# Altium PCB SRX.PcbDoc (part 2 of 2)
Units mm, origin at the board's own origin, x right, y up, seen from the top; angles counter-clockwise.
Board outline 75 x 42 mm, 4 copper layers (Outer Top Layer, Inner Top Layer, Inner Bottom Layer, Outer Bottom Layer), stack 1.564 mm thick; 114 components, 89 nets, 403 pads, 367 vias.
Unrouted connection lines stored in the file: 107.
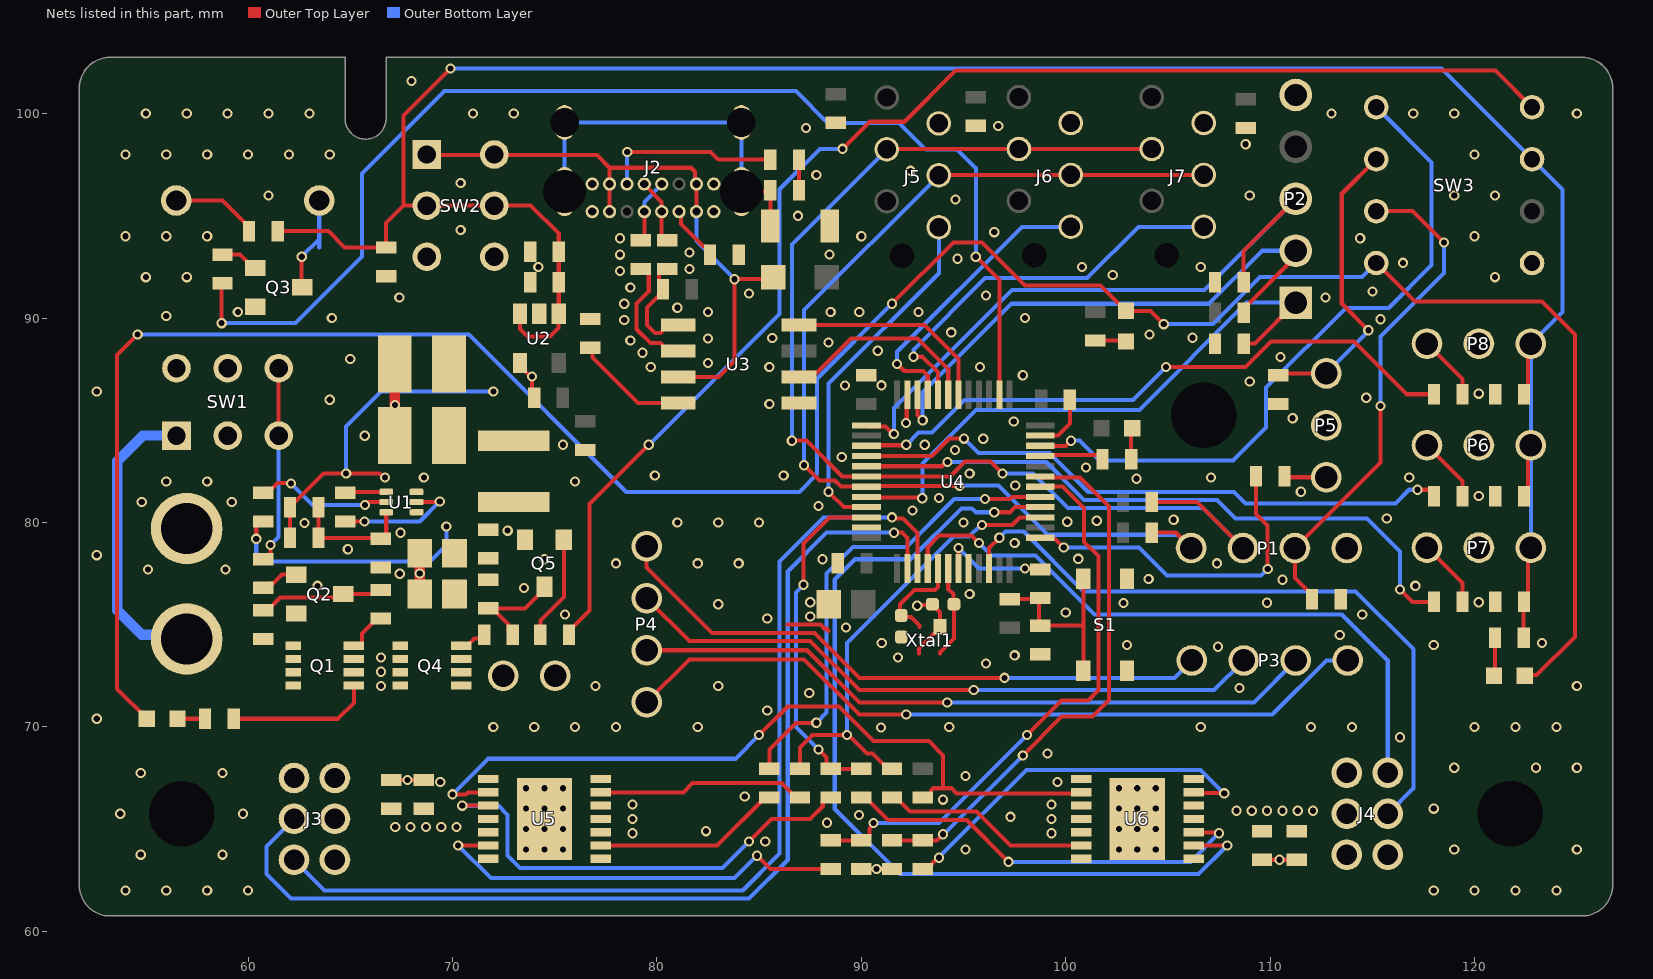
[diagram p4: the nets of this part, all layers, seen from the top]

## Via types
v1: diameter 0.5, hole 0.3, Outer Top Layer to Outer Bottom Layer, 367 vias

## Nets (pads, with @x,y where several pads share a name; then routed paths per layer and width w, separated by ;. In a path a pad name is that pad's centre, name@x,y a point inside that pad or via, vN(x,y) a via of type N, cw(c..) or ccw(c..) an arc to the next point about the centre after c; other vN are vias at no path point) (continued)
+5V: C2.2 C12.2 C13.1 C32.1 C33.1 C34.1 P6.1 P7.1 P8.1 R4.1 R19.1 SW2.2 SW2.5 SW3.7 U2.1 U2.3 | length 116.3
  Outer Top Layer w0.2: R4.1@61.45,94.25 63.925,94.25 64.725,93.45 C12.2@66.75,93.45 66.75,94.648 67.602,95.5 ; v1(69.9,102.2) 67.602,99.902 67.602,95.5 ; U2.3@73.3,90.2 73.3,89.461 73.661,89.1 74.775,89.1 75.192,89.517 75.192,90.192 U2.1@75.2,90.2 C2.2@75.2,91.75 ; C2.2@75.25,91.8 C2.2@75.2,91.75 ; R19.1@122.4,74.35 122.4,76.103 C33.1@122.41,76.113 122.61,76.313 122.61,78.633 P7.1@122.75,78.773 ; C32.1@122.41,81.273 122.61,81.473 122.61,83.633 P6.1@122.75,83.773 ; C34.1@122.41,86.273 122.61,86.473 122.61,88.61 P8.1@122.75,88.75 ; 67.602,95.5 SW2.2@68.75,95.5 SW2.5@72.05,95.5 73.825,95.5 75.2,94.125 C13.1@75.2,93.25 C2.2@75.2,91.75
  Outer Bottom Layer w0.2: v1(69.9,102.2) 118.38,102.2 124.3,96.28 124.3,90.3 P8.1@122.75,88.75 P6.1@122.75,83.773 P7.1@122.75,78.773
+12V: C4.2 C5.2 C6.2 C15.2 C16.2 C20.2 C21.2 J3.2 J4.2 Q1.1 Q1.2 Q1.3 Q4.5 Q4.6 Q4.7 Q4.8 R3.1 R9.2 R20.2 U1.1 U5.11 U5.12 U6.11 U6.12 | length 19.6
  Outer Top Layer w0.2: R20.2@59.3,70.4 64.4,70.4 65.175,71.175 Q1.1@65.175,72.025 ; v1(60.4,79.2) 60.4,79.85 60.6,80.05 R3.1@60.75,80.05
  Outer Bottom Layer w0.2: v1(60.4,79.2) 60.4,78.4 60.7,78.1 68.9,78.1 69.7,78.9 v1(69.7,79.8)
  other v1: 67.2,65.1 67.95,65.1 68.7,65.1 69.45,65.1 70.2,65.1 108.35,65.9 109.1,65.9 109.85,65.9 110.6,65.9 111.35,65.9 112.1,65.9 66.5,72 66.5,72.7 66.5,73.4
BAT+: J1.1 Q1.5 Q1.6 Q1.7 Q1.8 R2.2 SW1.1 SW1.2 SW1.5 SW1.6 | length 14.7
  Outer Bottom Layer w0.5: SW1.1@56.5,84.25 54.85,84.25 53.6,83 53.6,75.7 54.793,74.507 56.793,74.507 J1.1@57,74.3
BAT_SW: R6.2 SW1.3 SW1.4 | length 9.7
  Outer Top Layer w0.2: R6.2@60.75,78.2 60.9,78.2 61.1,78.4 v1(61.1,78.9) ; SW1.3@61.5,84.25 SW1.4@61.5,87.55
  Outer Bottom Layer w0.2: v1(61.1,78.9) 61.5,79.3 SW1.3@61.5,84.25
BOOT0: P2.1 R39.2 U4.44 | length 29.4
  Outer Top Layer w0.2: U4.44@90.25,81.25 90.283,81.217 92.95,81.217 v1(92.983,81.185) ; R39.2@108.7,88.75 109.25,88.75 P2.1@111.25,90.75
  Outer Bottom Layer w0.2: v1(92.983,81.185) 92.983,82.883 95.6,85.5 103.6,85.5 108.85,90.75 P2.1@111.25,90.75
BUZZER: R8.1 U4.26 | length 59.1
  Outer Top Layer w0.2: v1(58.71,89.75) 58.71,91.66 R8.1@58.75,91.7 ; v1(95.6,93) 96.75,91.85 U4.26@96.75,86.25
  Outer Bottom Layer w0.2: v1(58.71,89.75) 62.325,89.75 65.575,93 65.575,97.075 69.6,101.1 86.8,101.1 88.35,99.55 91.85,99.55 93.15,98.25 94.675,98.25 95.6,97.325 v1(95.6,93)
CS: R24.1 R25.1 U4.46 | length 17.1
  Outer Top Layer w0.2: v1(87.175,76.95) 87.175,78.975 88.45,80.25 U4.46@90.25,80.25 ; v1(87.9,68.9) 88.3,68.5 88.3,67.95 88.8,67.95 R25.1@90,67.95
  Outer Bottom Layer w0.2: v1(87.175,76.95) 86.8,76.575 86.8,70 v1(87.9,68.9)
D_N: J2.A7 J2.B7 R16.1 | length 3.2
  Outer Top Layer w0.2: R16.1@79.2,93.8 79.385,93.985 J2.A7@79.385,95.205
  Outer Bottom Layer w0.2: J2.A7@79.385,95.205 79.394,95.214 79.394,95.68 80.235,96.521 J2.B7@80.235,96.555
D_P: J2.A6 J2.B6 R13.1 | length 3.3
  Outer Top Layer w0.2: J2.B6@79.385,96.555 79.385,96.521 80.235,95.671 80.235,94 80.435,93.8 R13.1@80.5,93.8
DBG_LED: R21.2 U4.21 | length 3.2
  Outer Top Layer w0.2: U4.21@98.75,83.25 98.795,83.295 101.6,83.295 101.8,83.095 R21.2@101.8,83
EN: R31.2 U4.7 | length 5.4
  Outer Top Layer w0.2: U4.7@94.75,77.75 v1(94.75,78.75) ; v1(98,77.75) 98.7,77.75 R31.2@98.75,77.7
  Outer Bottom Layer w0.2: v1(94.75,78.75) 95.75,77.75 v1(98,77.75)
GND: C2.1 C3.1 C4.1 C5.1 C6.1 C8.1 C9.1 C10.2 C11.2 C12.1 C13.2 C14.1 C15.1 C16.1 C17.2 C18.2 C19.1 C20.1 C21.1 C22.2 C23.2 C24.2 C25.1 C26.1 C27.1 C28.2 C29.2 C30.2 C31.2 C32.2 C33.2 C34.2 C35.2 J1.2 J2.A1 J2.A12 J2.B1 J2.B12 J3.1 J4.1 J5.2 J6.2 J7.2 P1.1 P2.5 P5.2 P6.2 P7.2 P8.2 P9.2 Q2.2 Q3.2 Q5.2 R7.1 R14.1 R15.2 R17.2 R38.1 R39.1 S1.3 S1.4 SW3.5 U1.3 U2.2 U2.4 U3.1 U4.8 U4.23 U4.35 U4.47 U5.3 U5.4 U5.5 U5.15 U6.3 U6.4 U6.5 U6.15 Xtal1.2 Xtal1.4 | length 24
  Outer Top Layer w0.2: C15.1@67,67.4 v1(67.8,67.4) C20.1@68.6,67.4 ; U2.4@73.3,87.8 73.3,87.65 73.808,87.142 v1(73.889,87.142) 73.889,86.211 C3.1@74,86.1 ; 86.391,75.003 87.997,75.003 88.2,74.8 88.3,74.8 88.4,74.7 ; C14.1@86.95,96.25 R14.1@86.95,97.75 ; C23.2@90,63.05 C24.2@91.5,63.05 ; v1(92.19,84.859) 92.22,84.889 92.22,86.22 U4.35@92.25,86.25 ; v1(92.738,75.927) 92.775,75.963 93.438,75.963 C27.1@93.475,76 93.475,75.983 93.85,75.608 Xtal1.4@93.85,74.9 93.85,74.85 92.825,73.825 Xtal1.2@92.825,73.6 ; U4.23@98.75,84.25 99.618,84.25 100.2,84.832 C18.2@100.2,86 ; C21.1@109.6,63.5 C16.1@111.3,63.5
  Outer Top Layer w0.5: C9.1@67.175,84.25 67.186,84.261 v1(67.186,85.75) 67.175,85.761 C8.1@67.175,87.75 ; C4.1@68.4,76.5 C5.1@68.4,78.5
  other v1: 54,62 56,62 58,62 60,62 118,62 120,62 122,62 124,62 90.75,63.05 110.45,63.5 54.75,63.75 58.75,63.75 73.6,64 74.5,64 75.4,64 95.1,64 102.6,64 103.5,64 104.4,64 119,64 125,64 85.3,64.4 78.8,64.8 99.3,64.8 82.4,64.9 73.6,65 74.5,65 75.4,65 102.6,65 103.5,65 104.4,65 88.317,65.311 78.8,65.5 99.3,65.5 97.3,65.6 89.882,65.691 53.75,65.75 59.75,65.75 73.6,66 74.5,66 75.4,66 102.6,66 103.5,66 104.4,66 118,66 78.8,66.2 99.3,66.2 93.995,66.44 84.3,66.6 73.6,67 74.5,67 75.4,67 102.6,67 103.5,67 104.4,67 69.4,67.3 99.6,67.3 95.1,67.6 54.75,67.75 58.75,67.75 119,68 123,68 125,68 99.1,68.7 116.354,69.494 90.966,69.967 72,70 74,70 76,70 78,70 82,70 94.3,70 106.6,70 112,70 114,70 120,70 122,70 124,70 52.6,70.4 85.4,70.8 87.452,71.661 108.5,71.9 77,72 83,72 125,72 96.1,73.1 91.8,73.4 97.5,73.5 107.448,73.922 103,74 118,74 91,74.1 123.3,74.1 113.4,74.5 89.255,74.856 85.4,75.3 87.5,75.4 75.5,75.5 114.5,75.5 100,75.6 83,76 102.823,76.056 109.837,76.071 87.5,76.1 120.2,76.1 95.3,76.5 73.5,76.8 63.4,76.9 117.1,76.9 110.6,77.2 104.054,77.233 67.42,77.494 68.4,77.5 55.1,77.7 58.9,77.7 78,78 82,78 84,78 107.4,78 74.5,78.2 88.1,78.2 100.614,78.222 52.6,78.4 64.882,78.693 97.5,79 67.454,79.498 72.7,79.6 62.758,79.975 81,80 83,80 85,80 95,80 100.074,80.038 101.514,80.084 105.279,80.13 115.7,80.2 92.5,80.592 87.9,80.8 54.8,81 59.2,81 93.8,81.2 120.2,81.3 111.5,81.5 97.528,81.809 56,82 58,82 76,82 103.457,82.139 68.6,82.2 107.1,82.2 116.8,82.2 79.9,82.3 86.2,82.3 95.3,82.4 100.985,82.695 89.041,83.207 94.588,83.549 75.4,83.8 93.1,83.8 95.967,84.097 65.707,84.239 97.454,84.94 111.1,85.1 85.5,85.8 64,86 114.7,86.1 120.2,86.3 52.6,86.4 89.2,86.7 90.983,86.709 109,86.9 97.9,87.2 79.7,87.6 85.5,87.6 95.8,87.6 82.5,87.8 65,88 110.5,88.1 79.3,88.3 90.8,88.4 88.4,88.8 78.7,88.9 82.5,89 85.643,89.021 106.195,89.037 104.1,89.2 94.4,89.3 78.4,89.9 115.394,89.939 64.1,90 98,90 56,90.1 59.5,90.3 82.5,90.3 88.5,90.3 89.9,90.3 92.8,90.3 81,90.5 78.4,90.7 67.4,91 112.7,91 96.1,91.1 84.5,91.2 115,91.3 78.7,91.5 55,92 57,92 121,92 102.3,92.1 78.2,92.3 81.6,92.4 74.2,92.5 100.8,92.5 106.6,92.5 116.5,92.7 94.7,92.9 78.2,93.1 88.445,93.111 81.6,93.2 78.2,93.9 114.4,93.9 54,94 56,94 58,94 90,94 120,94 96.5,94.2 70.4,94.3 86.9,95 94.6,95.8 61,96 109,96 119,96 121,96 70.4,96.6 87.8,97 92.4,97.2 54,98 56,98 58,98 60,98 62,98 64,98 120,98 108.8,98.5 87.3,99.3 96.7,99.4 55,100 57,100 59,100 61,100 63,100 71,100 73,100 113,100 117,100 119,100 125,100 68,101.6
HE1_A: J3.5 U4.2 | length 52.4
  Outer Top Layer w0.2: v1(91.6,79.5) 92,79.5 92.25,79.25 U4.2@92.25,77.75
  Outer Bottom Layer w0.2: J3.5@62.25,65.5 60.9,64.15 60.9,62.8 62.1,61.6 84.5,61.6 86.4,63.5 86.4,77.6 88.3,79.5 v1(91.6,79.5)
HE1_B: J3.6 U4.3 | length 49.1
  Outer Top Layer w0.2: v1(91.5,80.25) 91.557,80.193 92.04,80.193 92.75,79.483 U4.3@92.75,77.75
  Outer Bottom Layer w0.2: J3.6@62.25,63.5 63.75,62 84.2,62 86,63.8 86,78.1 88.15,80.25 v1(91.5,80.25)
HE2_A: J4.6 U4.4 | length 31.8
  Outer Top Layer w0.2: U4.4@93.25,77.75 93.25,78.8 93.808,79.358 95.392,79.358 v1(95.75,79)
  Outer Bottom Layer w0.2: v1(95.75,79) 96.369,78.381 98.519,78.381 101.4,75.5 113.5,75.5 115.75,73.25 J4.6@115.75,67.75
HE2_B: J4.5 U4.10 | length 33
  Outer Top Layer w0.2: U4.10@96.25,77.75 96.25,78.75 v1(96.75,79.25)
  Outer Bottom Layer w0.2: v1(96.75,79.25) 97.055,79.555 97.945,79.555 100.872,76.628 114.172,76.628 117,73.8 117,67 J4.5@115.75,65.75
IS1: C23.1 R28.1 U4.18 | length 28.2
  Outer Top Layer w0.2: R28.1@88.5,64.45 90.2,64.45 90.4,64.65 90.4,65.019 90.6,65.219 v1(90.6,65.3) ; v1(98.1,69.6) 99.8,71.3 101.1,71.3 101.6,71.8 101.6,78.35 100.9,79.05 100.9,80.7 99.85,81.75 U4.18@98.75,81.75
  Outer Bottom Layer w0.2: v1(90.6,65.3) 93.8,65.3 v1(98.1,69.6)
IS2: C24.1 R29.1 U4.19 | length 26.9
  Outer Top Layer w0.2: C24.1@91.5,64.45 R29.1@93,64.45 93.7,64.45 v1(94,64.75) ; v1(97.9,68.6) 99.8,70.5 101.3,70.5 102.125,71.325 102.125,80.775 100.696,82.204 98.796,82.204 U4.19@98.75,82.25
  Outer Bottom Layer w0.2: v1(94,64.75) 94.05,64.75 v1(97.9,68.6)
LED_GND: D3.1 D4.1 D5.1 SW3.4 | length 123.5
  Outer Top Layer w0.2: v1(54.6,89.2) 53.6,88.2 53.6,71.85 D5.1@55.05,70.4 ; v1(91.5,90.7) 94.5,93.7 95.9,93.7 98,91.6 101.7,91.6 D3.1@102.95,90.35 104.142,90.35 v1(104.792,89.7) ; SW3.4@115.19,92.69 117.08,90.8 123.3,90.8 124.9,89.2 124.9,74.4 123.033,72.533 122.483,72.533 D4.1@122.45,72.5
  Outer Bottom Layer w0.2: v1(54.6,89.2) 70.8,89.2 78.5,81.5 86.967,81.5 87.831,82.363 87.831,87.031 v1(91.5,90.7) ; v1(104.792,89.7) 107.2,89.7 109.5,92 114.5,92 SW3.4@115.19,92.69
LIGHTS: R11.2 SW3.8 | length 66
  Outer Top Layer w0.2: R11.2@75.7,74.5 75.7,74.7 76.7,75.7 76.7,80.9 v1(79.6,83.8) ; v1(89.08,98.277) 90.403,99.6 92.1,99.6 94.6,102.1 121.02,102.1 SW3.8@122.81,100.31
  Outer Bottom Layer w0.2: v1(79.6,83.8) 79.608,83.8 86,90.192 86,96.3 87.977,98.277 v1(89.08,98.277)
LIGHTS_PWR: P9.1 Q4.1 Q4.2 Q4.3
LIGHTS_SW: SW3.1 U4.22 | length 33.6
  Outer Top Layer w0.2: U4.22@98.75,83.75 100,83.75 v1(100.25,84)
  Outer Bottom Layer w0.2: v1(100.25,84) 100.683,84 101.642,83.041 108.191,83.041 109.8,84.65 109.8,86.6 113.7,90.5 115.8,90.5 117.9,92.6 117.9,97.6 SW3.1@115.19,100.31
M1_N: J3.4 U5.7 U5.8
M1_P: J3.3 U5.1 U5.14
M2_N: J4.4 U6.7 U6.8
M2_P: J4.3 U6.1 U6.14
MCU_RX: U3.2 U4.31 | length 10
  Outer Top Layer w0.2: U3.2@86.95,87.115 87.175,87.34 87.84,87.34 89.5,89 92.75,89 94.25,87.5 U4.31@94.25,86.25
MCU_TX: U3.4 U4.30 | length 10.2
  Outer Top Layer w0.2: U3.4@86.95,89.655 93.095,89.655 94.75,88 U4.30@94.75,86.25
NetC1_1: C1.1 R1.1 R7.2 U1.6 | length 6
  Outer Top Layer w0.2: C1.1@63.45,80.75 R1.1@63.45,79.25 66.45,79.25 R7.2@66.5,79.2 66.56,79.2 66.76,79.4 U1.6@66.76,80.5
NetC7_1: C7.1 U1.4 | length 2
  Outer Top Layer w0.2: C7.1@64.75,81.45 64.8,81.5 U1.4@66.76,81.5
NetC7_2: C7.2 L1.1 U1.2 | length 6.2
  Outer Top Layer w0.2: C7.2@64.75,80.05 v1(65.7,80.05) ; U1.2@68.24,81 69.35,81 v1(69.375,81.025)
  Outer Bottom Layer w0.2: v1(65.7,80.05) 68.4,80.05 v1(69.375,81.025)
NetC11_1: C11.1 U3.8 | length 5.6
  Outer Top Layer w0.2: C11.1@76.75,88.55 76.858,88.442 76.858,88.067 79.08,85.845 U3.8@81.05,85.845
NetC14_2: C14.2 J2.1 J2.2 J2.3 J2.4 R17.1 | length 18.6
  Outer Top Layer w0.2: J2.1@84.135,96.185 85.485,96.185 C14.2@85.55,96.25 R17.1@85.55,94.5
  Outer Bottom Layer w0.2: J2.2@75.485,96.185 J2.4@75.485,99.565 J2.3@84.135,99.565 J2.1@84.135,96.185
NetC25_2: C25.2 R30.1 R31.1 S1.1 S1.2 | length 8.9
  Outer Top Layer w0.2: R30.1@97.25,76.25 R31.1@98.7,76.25 ; R31.1@98.75,76.3 R31.1@98.7,76.25 ; 100.875,73.267 100.875,74.95 ; S1.2@100.875,77.25 100.875,74.95 ; R31.1@98.7,76.25 98.7,75 C25.2@98.75,74.95 100.875,74.95
NetC26_2: C26.2 U4.5 Xtal1.1 | length 4.8
  Outer Top Layer w0.2: C26.2@91.9,75.45 91.9,76 92.6,76.7 93.6,76.7 93.75,76.85 U4.5@93.75,77.75 ; C26.2@91.95,75.434 91.983,75.434 92.045,75.372 92.428,75.372 92.85,74.95 Xtal1.1@92.85,74.9
NetC27_2: C27.2 U4.6 Xtal1.3 | length 4.5
  Outer Top Layer w0.2: Xtal1.3@93.85,73.6 93.85,73.65 94.525,74.325 C27.2@94.525,76 94.5,76.025 94.5,76.5 94.25,76.75 U4.6@94.25,77.75
NetD2_1: D2.1 R21.1 | length 1.5
  Outer Top Layer w0.2: R21.1@103.2,83.1 103.2,84.55 D2.1@103.25,84.6
NetD3_2: D3.2 R18.1 | length 1.5
  Outer Top Layer w0.2: R18.1@101.45,88.9 102.9,88.9 D3.2@102.95,88.85
NetD4_2: D4.2 R19.2 | length 1.8
  Outer Top Layer w0.2: D4.2@120.95,72.6 121,72.65 R19.2@121,74.35
NetD5_2: D5.2 R20.1 | length 1.3
  Outer Top Layer w0.2: D5.2@56.55,70.4 R20.1@57.9,70.4
NetJ2_A5: J2.A5 R15.1 | length 2.7
  Outer Top Layer w0.2: J2.A5@81.085,95.205 81.169,95.121 81.169,94.606 82.275,93.5 82.4,93.5 82.575,93.325 R15.1@82.575,93.2
NetJ2_B5: J2.B5 R14.2 | length 8.7
  Outer Top Layer w0.2: v1(78.55,98.125) 82.625,98.125 83,97.75 R14.2@85.55,97.75
  Outer Bottom Layer w0.2: J2.B5@78.535,96.555 78.542,96.563 78.542,98.117 v1(78.55,98.125)
NetLS1_1: LS1.1 R4.2 | length 4.3
  Outer Top Layer w0.2: LS1.1@56.485,95.75 58.75,95.75 60.05,94.45 R4.2@60.05,94.25
NetLS1_2: LS1.2 Q3.3 | length 5
  Outer Top Layer w0.2: Q3.3@62.625,91.5 v1(62.625,93)
  Outer Bottom Layer w0.2: v1(62.625,93) 63.485,93.86 ; 63.485,93.46 63.485,93.86 ; LS1.2@63.485,95.75 63.485,93.86
NetP3_1: P3.1 P4.1 | length 37.4
  Outer Top Layer w0.2: P4.1@79.5,71.21 81.59,73.3 87.2,73.3 89.9,70.6 v1(92.2,70.6)
  Outer Bottom Layer w0.2: v1(92.2,70.6) 110.1,70.6 112.75,73.25 P3.1@113.79,73.25
NetP3_2: P3.2 P4.2 | length 33.7
  Outer Top Layer w0.2: P4.2@79.5,73.75 87.35,73.75 89.9,71.2 v1(94.2,71.2)
  Outer Bottom Layer w0.2: v1(94.2,71.2) 109.2,71.2 P3.2@111.25,73.25
NetP3_3: P3.3 P4.3 | length 31.7
  Outer Top Layer w0.2: P4.3@79.5,76.29 81.59,74.2 87.5,74.2 89.9,71.8 v1(95.5,71.8)
  Outer Bottom Layer w0.2: v1(95.5,71.8) 107.26,71.8 P3.3@108.71,73.25
NetP3_4: P3.4 P4.4 | length 30.3
  Outer Top Layer w0.2: P4.4@79.5,78.83 79.5,77.8 82.7,74.6 87.7,74.6 89.9,72.4 v1(97,72.4)
  Outer Bottom Layer w0.2: v1(97,72.4) 105.32,72.4 P3.4@106.17,73.25
NetP5_1: P5.1 R35.2 | length 2.1
  Outer Top Layer w0.2: R35.2@110.7,82.25 110.74,82.21 P5.1@112.75,82.21
NetP6_3: P6.3 R36.1 | length 3.2
  Outer Top Layer w0.2: P6.3@117.67,83.773 119.41,82.033 R36.1@119.41,81.273
NetP7_3: P7.3 R37.1 | length 3.4
  Outer Top Layer w0.2: P7.3@117.67,78.773 119.41,77.033 R37.1@119.41,76.113
NetP8_3: P8.3 R40.1 | length 3.2
  Outer Top Layer w0.2: P8.3@117.67,88.75 119.41,87.01 R40.1@119.41,86.273
NetQ1_4: Q1.4 R5.1 | length 2.2
  Outer Top Layer w0.2: Q1.4@65.175,73.975 65.467,73.975 65.57,74.077 65.57,74.57 66.3,75.3 R5.1@66.5,75.3
NetQ2_1: Q2.1 R6.1 | length 1.9
  Outer Top Layer w0.2: R6.1@60.75,76.8 60.95,77 61.2,77 61.65,77.45 Q2.1@62.35,77.45
NetQ2_3: Q2.3 R2.1 R5.2 | length 6.2
  Outer Top Layer w0.2: R2.1@60.75,75.7 60.95,75.7 61.575,76.325 64.475,76.325 Q2.3@64.65,76.5 66.1,76.5 66.3,76.7 R5.2@66.5,76.7
NetQ3_1: Q3.1 R8.2 | length 2
  Outer Top Layer w0.2: R8.2@58.75,93.1 59.6,93.1 60.348,92.352 Q3.1@60.448,92.352
NetQ4_4: Q4.4 R10.1 | length 1.3
  Outer Top Layer w0.2: Q4.4@70.425,73.975 70.717,73.975 71.067,74.325 71.375,74.325 R10.1@71.55,74.5
NetQ5_1: Q5.1 R11.1 | length 5.1
  Outer Top Layer w0.2: R11.1@74.3,74.5 74.3,75.2 75.45,76.35 Q5.1@75.45,79.15
NetQ5_3: Q5.3 R9.1 R10.2 | length 5
  Outer Top Layer w0.2: R9.1@71.75,75.8 R9.1@71.95,75.8 ; R10.2@72.95,74.5 72.75,74.7 72.75,75 R9.1@71.95,75.8 ; Q5.3@74.5,76.85 74.5,76.75 73.55,75.8 R9.1@71.95,75.8
NetR3_2: R3.2 U1.5 | length 6.7
  Outer Top Layer w0.2: R3.2@60.75,81.45 60.95,81.45 61.433,81.933 62.067,81.933 v1(62.1,81.9) ; v1(65.725,80.85) 65.875,81 U1.5@66.76,81
  Outer Bottom Layer w0.2: v1(62.1,81.9) 63.15,80.85 v1(65.725,80.85)
NetR22_1: R22.1 U5.9 U6.2 | length 38.3
  Outer Top Layer w0.2: v1(70,66.7) 70.65,66.7 70.75,66.8 U5.9@71.75,66.8 ; v1(85,69.6) 86.4,71 88.9,71 90.6,69.3 93.3,69.3 94,68.6 94,67 ; R22.1@93,66.55 93.2,66.55 93.4,66.75 93.4,66.883 93.517,67 94,67 ; U6.2@100.75,66.8 100.7,66.75 94.65,66.75 94.4,67 94,67
  Outer Bottom Layer w0.2: v1(70,66.7) 71.74,68.44 83.84,68.44 v1(85,69.6)
NetR23_2: R23.2 U5.2 | length 9.2
  Outer Top Layer w0.2: U5.2@77.25,64.2 82.95,64.2 85.3,66.55 R23.2@85.5,66.55
NetR24_2: R24.2 U5.10 | length 23.3
  Outer Top Layer w0.2: v1(70.481,66.147) 70.482,66.149 71.749,66.149 U5.10@71.75,66.15 ; v1(84.5,64.4) 85.6,65.5 87.5,65.5 88.113,66.113 88.113,66.35 88.313,66.55 R24.2@88.5,66.55
  Outer Bottom Layer w0.2: v1(70.481,66.147) 70.483,66.144 72.256,66.144 72.7,65.7 72.7,63.7 73.3,63.1 83.2,63.1 v1(84.5,64.4)
NetR25_2: R25.2 U6.10 | length 20.7
  Outer Top Layer w0.2: R25.2@90,66.55 90.2,66.55 91.307,65.443 95.157,65.443 v1(97.2,63.4) ; U6.10@106.25,64.85 106.275,64.825 107.475,64.825 v1(107.5,64.8)
  Outer Bottom Layer w0.2: v1(97.2,63.4) 106.1,63.4 v1(107.5,64.8)
NetR26_2: R26.2 U5.6 | length 10.2
  Outer Top Layer w0.2: U5.6@77.25,66.8 81.3,66.8 81.75,67.25 86.1,67.25 86.8,66.55 R26.2@87,66.55
NetR27_2: R27.2 U6.6 | length 10.2
  Outer Top Layer w0.2: R27.2@91.5,66.55 91.7,66.55 92.381,65.869 95.631,65.869 97.3,64.2 U6.6@100.75,64.2
NetR28_2: R28.2 U5.13 | length 21.1
  Outer Top Layer w0.2: v1(70.278,64.197) 70.279,64.199 71.749,64.199 U5.13@71.75,64.2 ; v1(84.9,63.7) 85.55,63.05 R28.2@88.5,63.05
  Outer Bottom Layer w0.2: v1(70.278,64.197) 71.875,62.6 83.8,62.6 v1(84.9,63.7)
NetR29_2: R29.2 U6.13 | length 18.8
  Outer Top Layer w0.2: R29.2@93,63.05 93.2,63.05 93.75,63.6 v1(93.8,63.6) ; U6.13@106.25,66.8 106.275,66.775 107.725,66.775 v1(107.75,66.75)
  Outer Bottom Layer w0.2: v1(93.8,63.6) 93.8,63.626 98.074,67.9 106.6,67.9 v1(107.75,66.75)
OLED_3V3: C35.1 P1.2 SW3.3 | length 24.8
  Outer Top Layer w0.2: C35.1@112.05,76.25 112.05,76.45 111.21,77.29 P1.2@111.21,78.75 115.4,82.94 v1(115.4,85.7) ; SW3.3@115.19,95.23 116.97,95.23 v1(118.5,93.7)
  Outer Bottom Layer w0.2: v1(115.4,85.7) 115.4,89.1 118.5,92.2 v1(118.5,93.7)
RF_5V: C31.1 P5.3 SW3.2 | length 15.1
  Outer Top Layer w0.2: C31.1@110.25,87.2 110.34,87.29 P5.3@112.75,87.29 ; v1(114.8,89.4) 113.5,90.7 113.5,96.08 SW3.2@115.19,97.77
  Outer Bottom Layer w0.2: P5.3@112.75,87.29 112.75,87.32 114.8,89.37 v1(114.8,89.4)
RF_DATA: R35.1 U4.13 | length 16.8
  Outer Top Layer w0.2: U4.13@98.75,79.25 98.8,79.2 99.475,79.2 v1(99.9,78.775) ; R35.1@109.3,82.25 109.3,80.425 109.877,79.848 v1(109.877,77.724)
  Outer Bottom Layer w0.2: v1(99.9,78.775) 103.575,78.775 104.95,77.4 109.553,77.4 v1(109.877,77.724)
SCK: R26.1 R27.1 U4.15 | length 23
  Outer Top Layer w0.2: R26.1@87,67.95 87,69 87.6,69.6 89.381,69.6 90.281,68.7 90.55,68.7 91.3,67.95 R27.1@91.5,67.95 ; v1(95.897,79.882) 97.382,79.882 97.75,80.25 U4.15@98.75,80.25
  Outer Bottom Layer w0.2: v1(89.3,69.6) 89.3,74.1 94.505,79.305 95.271,79.305 95.848,79.882 v1(95.897,79.882)
SCL: J5.3 J6.3 J7.3 P1.3 R33.1 U4.42 | length 59.4
  Outer Top Layer w0.2: v1(86.6,84) 87.316,84 89.066,82.25 U4.42@90.25,82.25 94.35,82.25 95.075,82.975 96.325,82.975 v1(96.9,82.4) ; J5.3@91.25,98.25 91.26,98.26 104.2,98.26 J7.3@104.21,98.27 ; R33.1@104.2,81 106.42,81 P1.3@108.67,78.75
  Outer Bottom Layer w0.2: v1(86.6,84) 86.6,93.6 J5.3@91.25,98.25 ; v1(96.9,82.4) 98.4,82.4 100.1,80.7 106.72,80.7 P1.3@108.67,78.75
SDA: J5.4 J6.4 J7.4 P1.4 R32.1 U4.43 | length 52.8
  Outer Top Layer w0.2: v1(87.2,82.8) 87.95,82.05 88.7,82.05 89,81.75 U4.43@90.25,81.75 90.275,81.775 94.775,81.775 v1(94.8,81.8) ; J5.4@93.79,96.98 93.8,96.99 106.74,96.99 J7.4@106.75,97 ; R32.1@104.2,79.5 105.38,79.5 P1.4@106.13,78.75
  Outer Bottom Layer w0.2: v1(87.2,82.8) 87.2,90.387 93.674,96.861 93.674,96.864 J5.4@93.79,96.98 ; v1(94.8,81.8) 96.7,81.8 99.1,79.4 105.461,79.4 106.111,78.75 P1.4@106.13,78.75
SDI: R23.1 U4.17 | length 23.3
  Outer Top Layer w0.2: R23.1@85.5,67.95 85.5,68.9 86.8,70.2 v1(87.8,70.2) ; v1(96.052,81.146) 97.278,81.146 97.383,81.25 U4.17@98.75,81.25
  Outer Bottom Layer w0.2: v1(87.8,70.2) 88.3,70.7 88.3,77.5 89.6,78.8 92.2,78.8 94.546,81.146 v1(96.052,81.146)
SDO: U4.16 U6.9 | length 45.6
  Outer Top Layer w0.2: v1(96.5,80.5) 97.276,80.5 97.526,80.75 U4.16@98.75,80.75 ; U6.9@106.25,64.2 v1(107.9,64.2)
  Outer Bottom Layer w0.2: v1(96.5,80.5) 95.6,80.5 95.409,80.691 94.891,80.691 92.4,78.2 89.7,78.2 88.7,77.2 88.7,65.989 91.889,62.8 106.5,62.8 v1(107.9,64.2)
SERVO_1: R40.2 U4.39 | length 30.9
  Outer Top Layer w0.2: U4.39@90.25,83.75 90.275,83.775 92.175,83.775 v1(92.2,83.8) ; v1(104.9,87.6) 108.8,87.6 110.05,88.85 114.1,88.85 116.677,86.273 R40.2@118.01,86.273
  Outer Bottom Layer w0.2: v1(92.2,83.8) 92.8,84.4 93.45,84.4 95.05,86 103.3,86 v1(104.9,87.6)
SERVO_2: R36.2 U4.40 | length 30
  Outer Top Layer w0.2: U4.40@90.25,83.25 93.45,83.25 94.3,84.1 v1(95.025,84.1) ; v1(117.2,81.6) 118.01,81.6 R36.2@118.01,81.273
  Outer Bottom Layer w0.2: v1(95.025,84.1) 95.725,83.4 99.2,83.4 101.1,81.5 108.225,81.5 108.8,80.925 116.125,80.925 116.8,81.6 v1(117.2,81.6)
SERVO_3: R37.2 U4.41 | length 31.8
  Outer Top Layer w0.2: U4.41@90.25,82.75 93.946,82.75 94.149,82.953 v1(94.213,82.953) ; v1(116.35,76.725) 116.962,76.113 R37.2@118.01,76.113
  Outer Bottom Layer w0.2: v1(94.213,82.953) 94.215,82.955 99.045,82.955 100.9,81.1 107.4,81.1 108.3,80.2 114.725,80.2 116.35,78.575 v1(116.35,76.725)
SW_5V: C1.2 C8.2 C9.2 L1.2 R1.2 SW2.3 SW2.4 | length 17.1
  Outer Top Layer w0.2: R1.2@62.05,79.25 C1.2@62.05,80.75 63.7,82.4 66.433,82.4 66.633,82.2 v1(66.7,82.2)
  Outer Bottom Layer w0.2: v1(64.8,82.4) 64.8,84.7 66.5,86.4 v1(72,86.4)
SWCLK: P2.3 R38.2 U4.37 | length 31.8
  Outer Top Layer w0.2: U4.37@90.25,84.75 90.3,84.7 91.187,84.7 91.562,84.325 v1(91.59,84.325) ; R38.2@108.7,91.75 108.7,93.28 P2.3@111.25,95.83
  Outer Bottom Layer w0.2: v1(91.59,84.325) 91.59,85.59 97.375,91.375 106.795,91.375 P2.3@111.25,95.83
SWDIO: P2.2 R34.2 U4.34 | length 27.9
  Outer Top Layer w0.2: U4.34@92.75,86.25 92.75,85.256 93,85.006 v1(93,85) ; R34.2@108.7,90.25 108.7,90.45 111.25,93 P2.2@111.25,93.29
  Outer Bottom Layer w0.2: v1(93,85) 93,86.35 97.35,90.7 107,90.7 109.59,93.29 P2.2@111.25,93.29
TOF_1: J5.6 U4.45 | length 17.3
  Outer Top Layer w0.2: v1(88.4,81.5) 89.15,80.75 U4.45@90.25,80.75
  Outer Bottom Layer w0.2: v1(88.4,81.5) 88.4,86.8 93.79,92.19 J5.6@93.79,94.44
TOF_2: J6.6 U4.33 | length 14.3
  Outer Top Layer w0.2: v1(91.75,87.75) 92.1,87.4 93.025,87.4 93.25,87.175 U4.33@93.25,86.25
  Outer Bottom Layer w0.2: v1(91.75,87.75) 91.75,88.35 97.86,94.46 J6.6@100.25,94.46
TOF_3: J7.6 U4.32 | length 19.6
  Outer Top Layer w0.2: v1(92.548,88.105) 92.995,88.105 93.75,87.35 U4.32@93.75,86.25
  Outer Bottom Layer w0.2: v1(92.548,88.105) 92.566,88.122 92.566,88.466 96.05,91.95 101.05,91.95 103.56,94.46 J7.6@106.75,94.46
USB_5V: D1.1 J2.A4 J2.A9 J2.B4 J2.B9 SW2.1 SW2.6 U3.7 | length 30.8
  Outer Top Layer w0.2: SW2.1@68.75,98 68.774,97.976 72.026,97.976 SW2.6@72.05,98 72.074,97.976 77.06,97.976 77.685,97.351 81.675,97.351 81.87,97.156 81.87,96.62 J2.B9@81.935,96.555 J2.A4@81.935,95.205 J2.A4@82.021,95.119 ; J2.A9@77.685,95.205 J2.B4@77.685,96.555 77.685,97.301 77.685,97.363 ; U3.7@81.05,87.115 83.015,87.115 83.8,87.9 v1(83.8,91.9) 85.6,91.9 D1.1@85.7,92
  Outer Bottom Layer w0.2: J2.A4@81.935,95.205 81.935,93.765 v1(83.8,91.9)
USB_D_N: R16.2 U3.6 | length 6
  Outer Top Layer w0.2: R16.2@79.2,92.4 79.4,92.4 79.6,92.2 79.6,91.593 79.6,91.3 79.011,90.711 79.011,89.451 79.693,88.77 80.183,88.77 80.3,88.653 80.3,88.61 80.525,88.385 U3.6@81.05,88.385
USB_D_P: R12.1 R13.2 U3.5 | length 5.2
  Outer Top Layer w0.2: R13.2@80.5,92.4 80.3,92.4 80.1,92.2 80.1,91.8 80.1,91.093 79.511,90.504 79.511,89.659 79.9,89.27 80.183,89.27 80.3,89.387 80.3,89.43 80.525,89.655 U3.5@81.05,89.655
pads on no net: J2.A8 J2.B8 J5.0 J5.5 J6.0 J6.5 J7.0 J7.5 U4.11 U4.12 U4.14 U4.20 U4.25 U4.27 U4.28 U4.29 U4.38

## Polygon pours and split planes (outlines as drawn)
M2_N on Outer Top Layer "Main" (solid, remove dead copper, pour order 10): 100.2,63.8 100.2,63 103,60.2 115.6,60.2 117,61.6 117,64 116.4,64.6 115.3,64.6 114.8,64.1 114.8,62.8 114.4,62.4 108.3,62.4 106.9,63.8 105.6,63.8 105.1,63.3 101.9,63.3 101.4,63.8
GND on Outer Top Layer "NONET_L01_P-001" (solid, remove dead copper, pour order 21): 48.7,103.4 127.5,103.4 127.5,58.4 48.7,58.4
GND on Outer Top Layer "Main" (solid, remove dead copper, pour order 24): 99.7,66.444 101.144,66.444 102.2,67.5 105,67.5 105,63.5 102.3,63.5 101.3,64.5 99.7,64.5
GND on Outer Top Layer "Main" (solid, remove dead copper, pour order 23): 73.1,67.5 75.8,67.5 76.8,66.5 79.1,66.5 79.1,64.5 76.8,64.5 75.8,63.5 73.1,63.5
GND on Outer Top Layer "Main" (solid, remove dead copper, pour order 22): 73.044,93.844 73.044,91.456 73.9,90.6 73.9,89.7 74.7,89.7 74.7,93.658 74.354,94.004 73.204,94.004
+3V3 on Outer Top Layer "Main" (solid, remove dead copper, pour order 20): 74.5,88.4 74.5,87.4 74.9,87 74.9,85.6 76.2,84.3 78.4,84.3 78.6,84.5 78.6,85.6 75.8,88.4
+3V3 on Outer Top Layer "Main" (solid, remove dead copper, pour order 17): 89.35,79.5 91.25,79.5 92,78.75 92,76.9 90.9,75.8 90.9,75.3 89.35,75.3
+12V on Outer Top Layer "Main" (solid, remove dead copper, pour order 8): 112.5,64.4 112.9,64.8 114.1,64.8 114.5,65.2 114.5,66.4 114.3,66.6 108.5,66.6 108.3,66.4 105.7,66.4 105.7,65.3 108.2,65.3 109.1,64.4
M1_N on Outer Top Layer "Main" (solid, remove dead copper, pour order 12): 77.05,68.55 71.35,68.55 70,69.9 62.9,69.9 61.5,68.5 61.5,67 61.8,66.7 62.8,66.7 63.2,67.1 63.2,67.9 64,68.7 68.7,68.7 70.2,67.2 72.4,67.2 72.9,67.7 76,67.7 76.5,67.2 77.8,67.2 77.8,67.8
+12V on Outer Top Layer "Main" (solid, remove dead copper, pour order 7): 72.3,64.6 72.3,65.746 69.654,65.746 69,66.4 63.9,66.4 63.5,66 63.5,64.6
M1_P on Outer Top Layer "Main" (solid, remove dead copper, pour order 11): 77.8,63.8 77.8,62.9 77.15,62.25 64.15,62.25 63.5,62.9 63.5,64 63.8,64.3 69.4,64.3 69.9,63.8 72.4,63.8 73,63.2 76.1,63.2 76.7,63.8
M2_P on Outer Top Layer "Main" (solid, remove dead copper, pour order 9): 100.2,67.2 101.3,67.2 101.8,67.7 105.1,67.7 105.6,67.2 107.1,67.2 112.7,67.2 112.9,67 114.3,67 114.5,67.2 114.5,68.4 114.3,68.6 100.7,68.6 100.2,68.1
BAT+ on Outer Top Layer "NONET_L01_P-001" (solid, remove dead copper, pour order 6): 56.2,87.8 59.4,87.8 59.4,84 56.2,84
LIGHTS_PWR on Outer Top Layer "Main" (solid, remove dead copper, pour order 5): 69.7,73.6 69.7,71.8 69.8,71.7 71.7,71.7 71.9,71.5 73.2,71.5 73.5,71.8 73.5,73.2 73.1,73.6
BAT+ on Outer Top Layer "Main" (solid, remove dead copper, pour order 4): 64.3,71.9 64.1,71.7 56.1,71.7 55.2,72.6 55.2,75.4 55.9,76.1 58.3,76.1 59.6,74.8 61.3,74.8 61.8,74.3 64.1,74.3 64.3,74.1
+12V on Outer Top Layer "Main" (solid, remove dead copper, pour order 3): 66,73.6 67.7,75.3 68.2,75.3 68.9,75.3 69.2,75.6 69.2,79.3 68.4,80.1 68,80.1 67.8,80.3 67.8,80.7 67.9,80.8 68.8,80.8 69.2,80.4 69.9,80.4 71.5,78.8 72.2,78.8 72.4,78.6 72.4,76.8 72.2,76.6 71.4,76.6 70.9,76.1 70.9,75.547 69.4,74.047 69.4,71.8 69.3,71.7 64.7,71.7 64.5,71.9 64.5,73.6
NetC7_2 on Outer Top Layer "Main" (solid, remove dead copper, pour order 1): 67.9,80.8 68.8,80.8 69.2,80.4 74.7,80.4 74.9,80.6 74.9,81.4 74.7,81.6 69.2,81.6 68.8,81.2 67.9,81.2
SW_5V on Outer Top Layer "Main" (solid, remove dead copper, pour order 0): 74.2,82.8 74.4,82.8 74.8,83.2 74.8,84.7 73.4,84.7 72.5,85.6 72.5,92.1 72.9,92.5 72.9,93.3 72.4,93.8 68.4,93.8 67.9,93.3 67.9,91.7 68.9,90.7 68.9,82.8
+3V3 on Inner Bottom Layer "NONET_L01_P-001" (solid, remove dead copper, shelved, pour order 16): 50.6,104.4 129.4,104.4 129.4,59.4 50.6,59.4
+12V on Inner Bottom Layer "Main" (solid, remove dead copper, pour order 15): 114.3,64.8 114.7,65.2 114.7,66.3 114.3,66.7 105.7,66.7 105.2,66.2 105.2,63.3 104.8,62.9 73.5,62.9 72.7,63.7 72.7,65.347 72.3,65.747 68.447,65.747 67.3,64.6 72,59.9 111.4,59.9 112.5,61 112.5,64.2 113.1,64.8
+12V on Inner Bottom Layer "Main" (solid, remove dead copper, pour order 14): 66,74 66,65.9 67.3,64.6 72.3,64.6 72.3,65.747 68.353,65.747 67.1,67 67.1,74
GND on Outer Bottom Layer "NONET_L01_P-001" (solid, remove dead copper, pour order 19): 48.4,105.2 127.2,105.2 127.2,60.2 48.4,60.2
+12V on Outer Bottom Layer "Main" (solid, remove dead copper, pour order 13): 66,74 66,65.9 67.3,64.6 72.3,64.6 72.3,65.747 68.353,65.747 67.1,67 67.1,74
GND on Inner Top Layer "NONET_L01_P-001" (solid, remove dead copper, pour order 18): 49.8,103.8 128.6,103.8 128.6,58.8 49.8,58.8

## Other copper
Outer Top Layer:
  pour cut-out: 73.8,73.8 73.4,73.8 73.4,74.4 73.8,74.4
  pour cut-out: 88.1,65 87.8,65.3 84.285,65.3 82.902,63.917 78.121,63.917 77.988,63.784 77.988,62.822 77.213,62.046 64.066,62.046 63.356,62.756 62.024,62.756 60.7,61.431 60.7,60.9 61.2,60.4 95.5,60.4 95.5,65
  pour cut-out: 80.8,90.8 81.2,90.8 81.2,91.9 80.8,91.9
  pour cut-out: 78.5,93.3 81.2,93.3 81.2,92.9 78.5,92.9
  pour cut-out: 98.3,66.5 98.8,66.5 98.8,64.5 98.3,64.5
Outer Bottom Layer:
  pour cut-out: 64.866,66.884 64.866,66.3 65.8,66.3 65.8,66.884

## Silkscreen, mask and mechanical layers (free items; w line width, h text height)
Top Overlay:
  lines w0.1: 59.6,82.1 59.9,81.8 59.9,78.2 59.9,77.8 60.1,77.6 ; 69.7,75.3 69.9,75.5 70.8,75.5 70.904,75.604 70.904,78.1 ; 73.4,96.1 73.4,94.9 73.7,94.6 73.7,94.1 ; 76.8,92.8 77.5,92.8 77.7,92.6 77.7,92 ; 77,92 77.7,92 ; 78.2,92 77.7,92 ; 85.9,75.7 86.8,75.7 ; 86.6,80.5 88.7,80.5 ; 86.7,77.4 87.1,77.8 87.6,77.8 ; 87.8,96.5 88,96.5 88.1,96.6 ; 87.8,97.7 88.1,97.7 ; 87.9,95.6 88.1,95.8 ; 92.4,73.3 92.4,74 ; 94.288,73.262 94.288,75.162 ; 105.5,88.2 106.7,88.2 106.7,91.4 ; 109.35,62.8 109.05,62.5 108.2,62.5 109.9,62.5 110.2,62.5 110.5,62.8 ; 115.9,80.6 116.143,80.357 120.357,80.357 120.6,80.6 ; 115.9,86.1 116.6,85.4 120.3,85.4 120.5,85.6 ; 120.1,73.35 120.1,73.5 120.3,73.7 ; 120.3,71.9 120.1,71.7 ; 120.3,75.2 120.1,75 120.1,71.7 ; 120.1,71.7 120.1,71.7
Mechanical 1:
  the board outline again, w0.1